# Altium PCB Car Power Supply 2x Line v1.0 (60x55x26 Case B035 BX35B-2).PcbDoc
Units mm, origin at the board's own origin, x right, y up, seen from the top; angles counter-clockwise.
Board outline 53.01 x 48 mm, 2 copper layers (Top Layer, Bottom Layer); 37 components, 19 nets, 68 pads, 4 vias.
Unrouted connection lines stored in the file: 4.
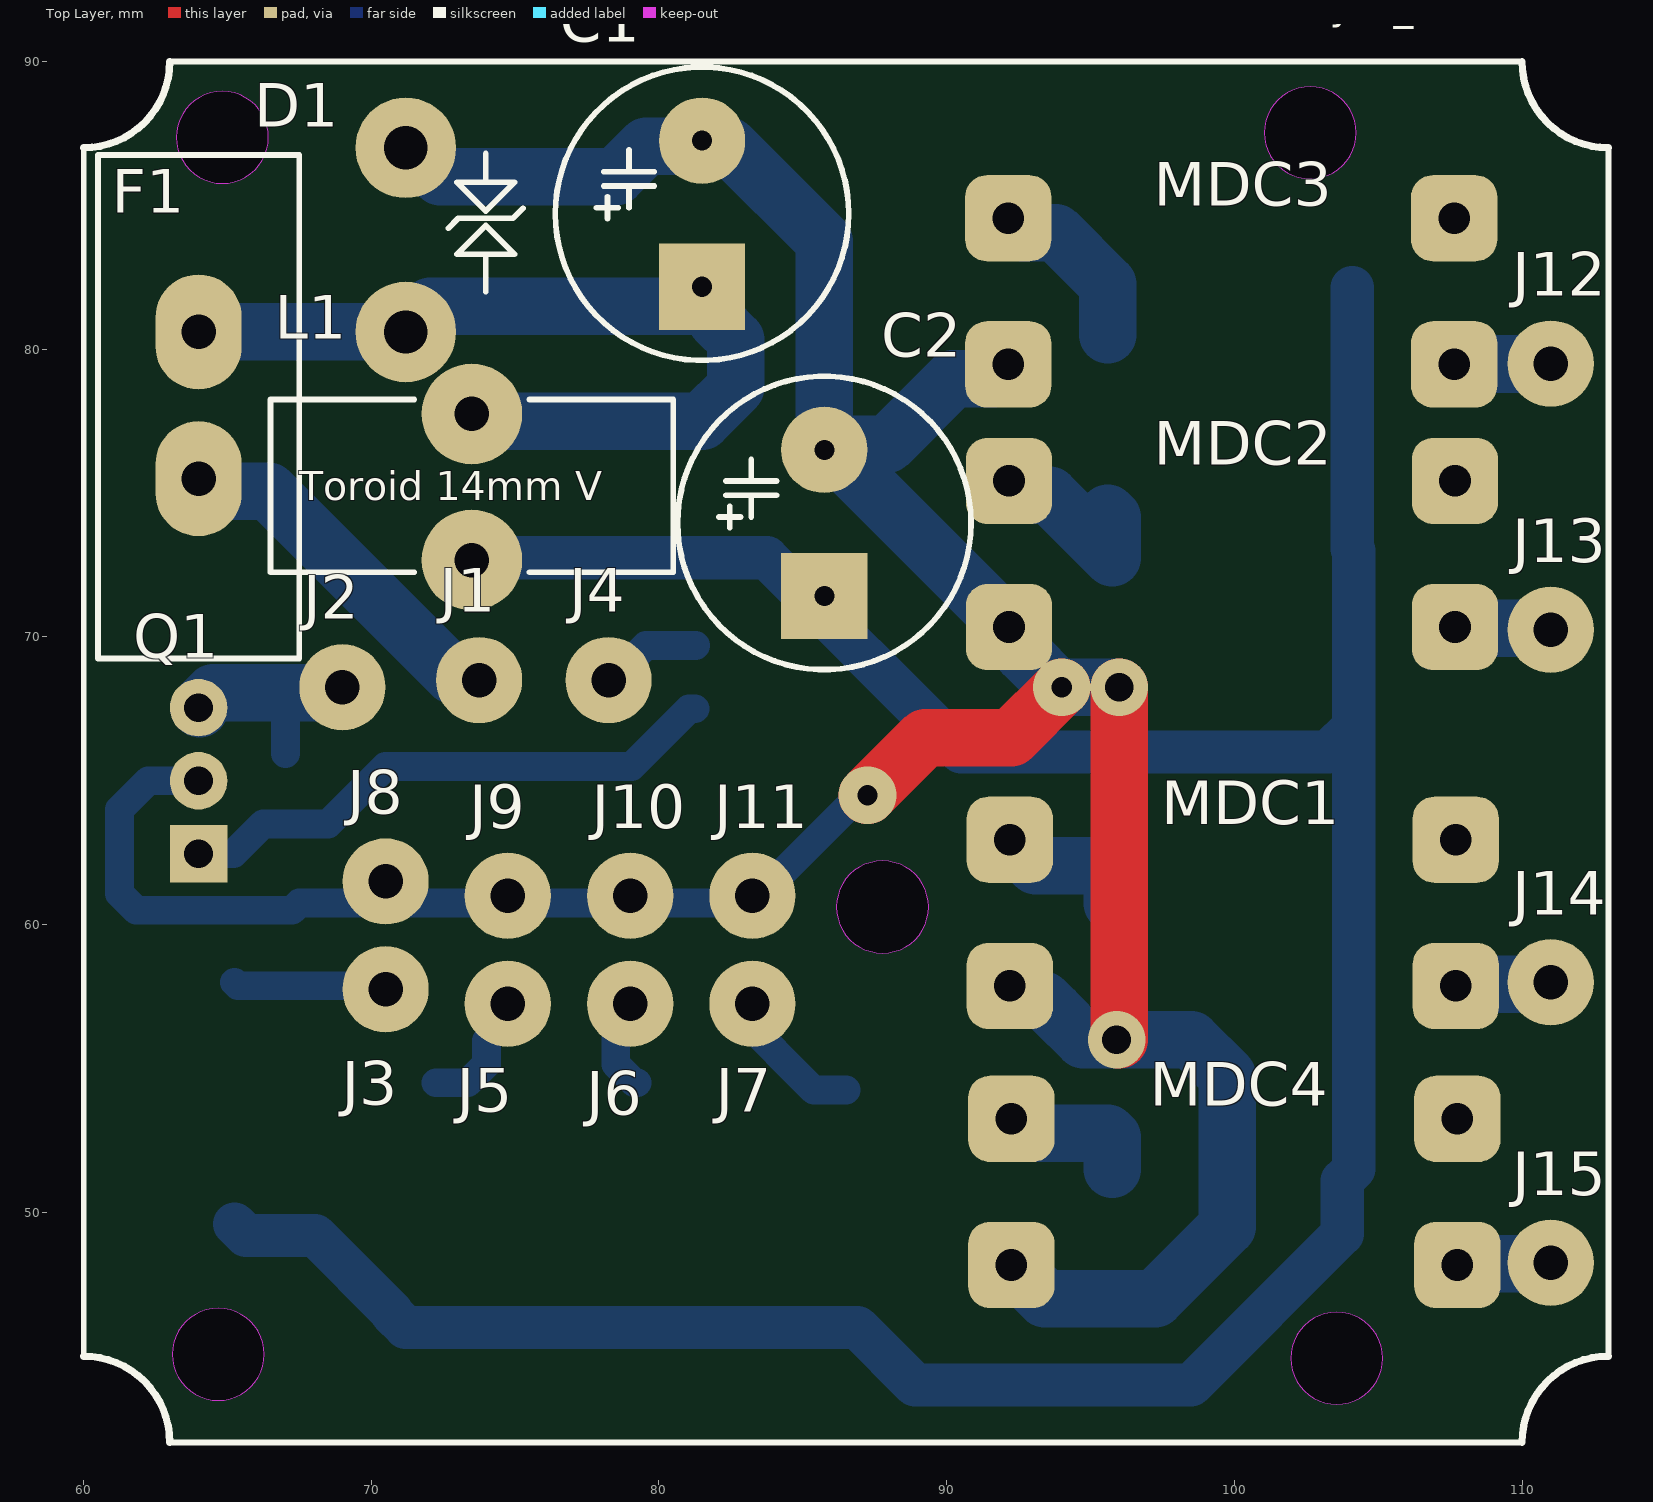
[diagram p0: Top Layer view]
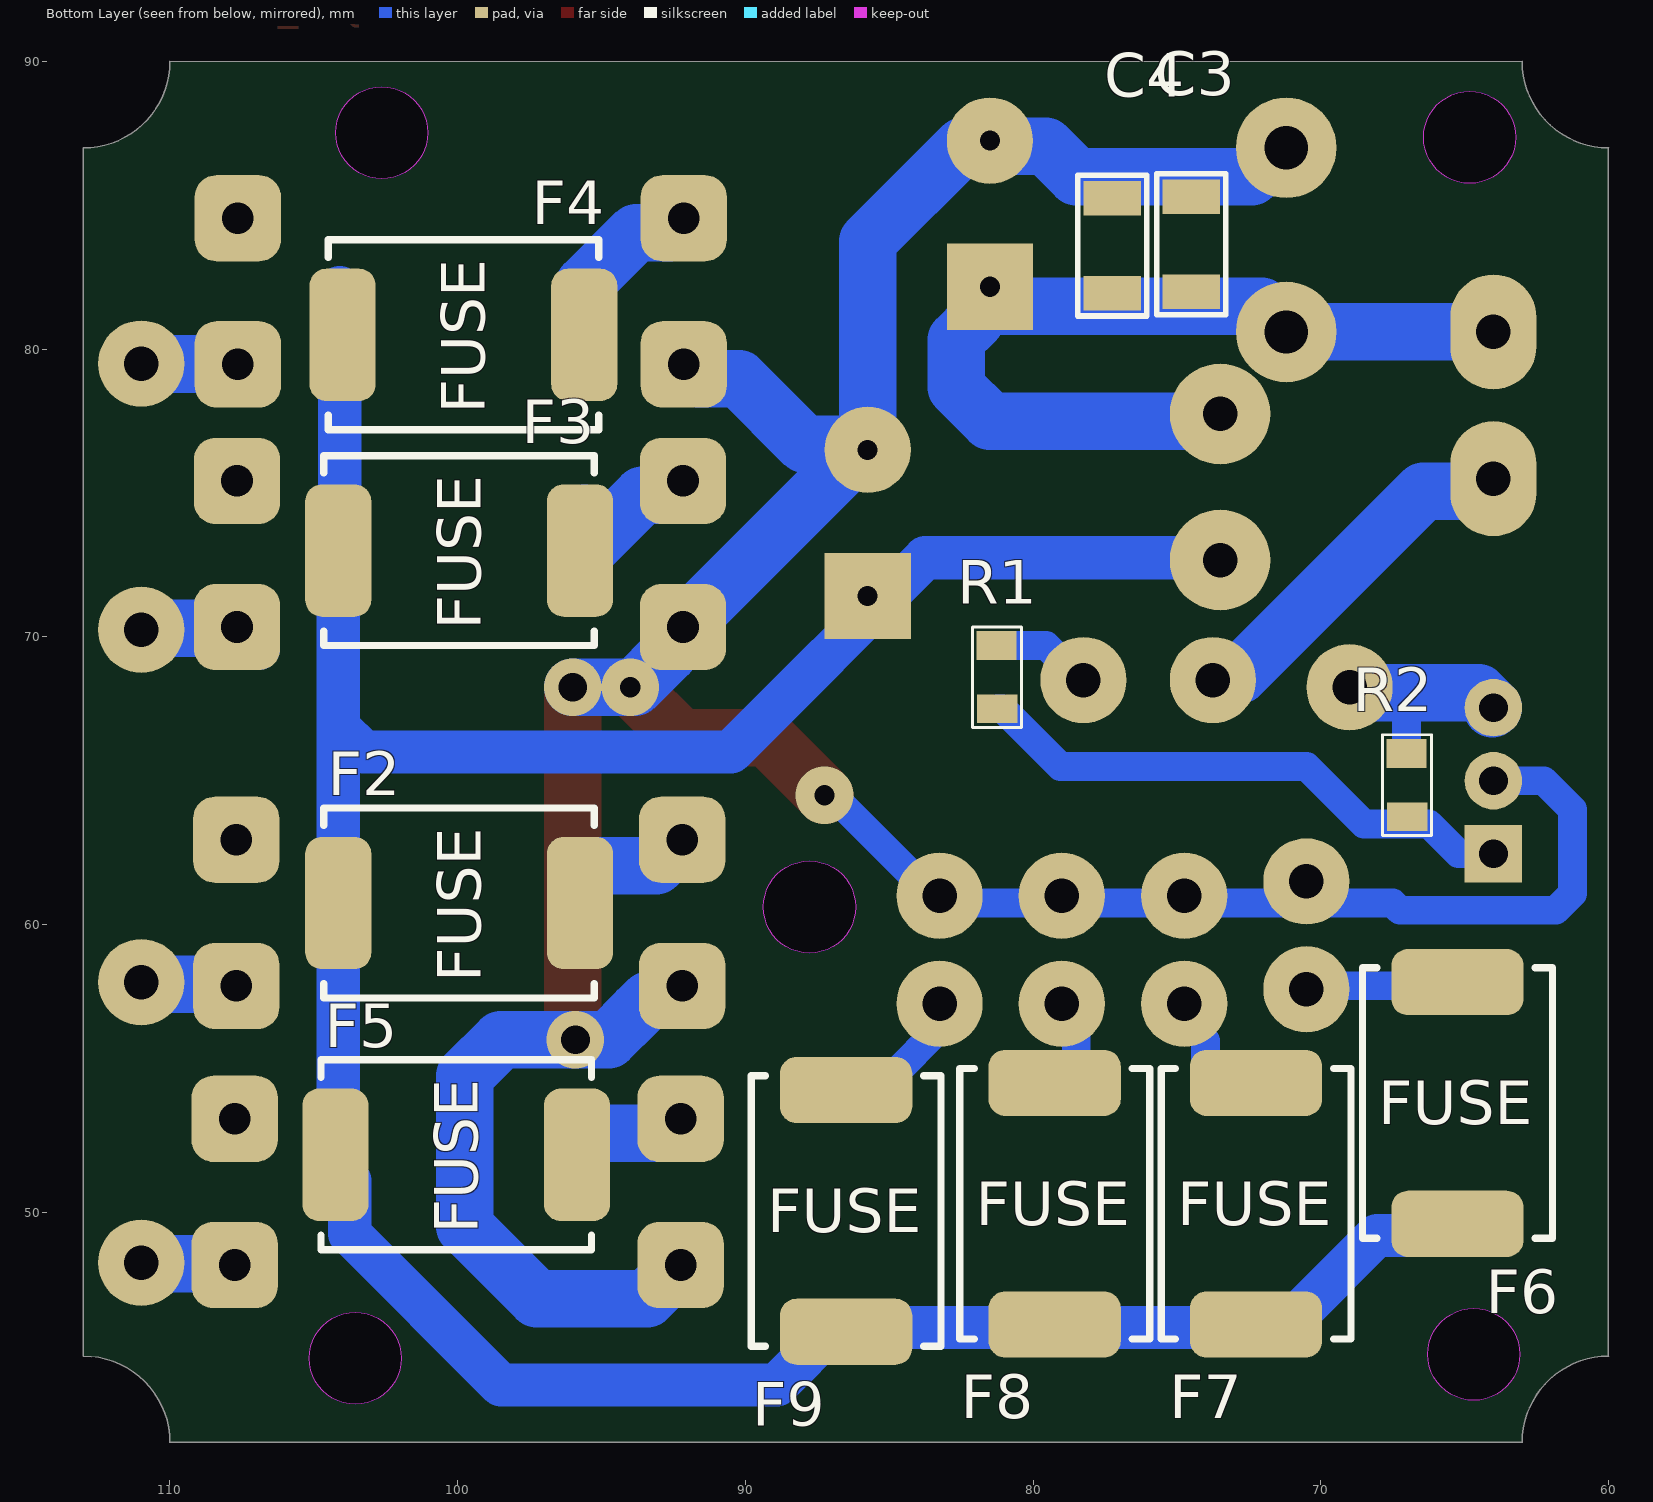
[diagram p1: Bottom Layer view, seen from below]

## Layer stack, top to bottom
Top Solder: solder mask 0.0102, Solder Resist, Dk 3.5
Top Layer: signal copper 0.0356
Dielectric 1: dielectric 0.32, FR-4, Dk 4.8
Bottom Layer: signal copper 0.0356
Bottom Solder: solder mask 0.0102, Solder Resist, Dk 3.5

## Board outline
60.006,45 60.006,87 60,87 ccw(c60,90) 63,90 63,89.998 110,90 ccw(c113,90) 113,87 113.006,87 113.006,45 113,45 ccw(c113,42) 110,42 63,42 ccw(c60,42)
cut-out: 86.172,60.612 ccw(c87.772,60.612) 87.772,59.012 ccw(c87.772,60.612) 89.372,60.612 ccw(c87.772,60.612) 87.772,62.212 ccw(c87.772,60.612)
cut-out: 63.081,45.062 ccw(c64.681,45.062) 64.681,43.462 ccw(c64.681,45.062) 66.281,45.062 ccw(c64.681,45.062) 64.681,46.662 ccw(c64.681,45.062)
cut-out: 63.23,87.361 ccw(c64.83,87.361) 64.83,85.761 ccw(c64.83,87.361) 66.43,87.361 ccw(c64.83,87.361) 64.83,88.961 ccw(c64.83,87.361)
cut-out: 101.962,44.931 ccw(c103.562,44.931) 103.562,43.331 ccw(c103.562,44.931) 105.162,44.931 ccw(c103.562,44.931) 103.562,46.531 ccw(c103.562,44.931)
cut-out: 101.038,87.522 ccw(c102.638,87.522) 102.638,85.922 ccw(c102.638,87.522) 104.238,87.522 ccw(c102.638,87.522) 102.638,89.122 ccw(c102.638,87.522)

## Design rules (kind name [scope] priority, off if disabled: settings)
Clearance [All] p1: gap=0.3 ignorepadtopadclearanceinfootprint=FALSE except(0: Arc-Hole Track-Hole SMDPad-Hole THPad-Hole Via-Hole Fill-Hole Poly-Hole Region-Hole Text-Hole)
ComponentClearance [All] p1: gap=0.01 collisioncheckmode=3 verticalgap=0.2 showdistances=FALSE
Height [All] p1: minheight=0 maxheight=25 prefheight=12.7
HoleSize [All] p1: absolutevalues=TRUE maxlimit=3.2 minlimit=0.4 maxpercent=80.000 minpercent=20.000
HoleToHoleClearance [All] p1: gap=0.2 allowstackedmicrovias=TRUE
PlaneClearance [All] p1: clearance=0.5
PlaneConnect [All] p1: planeconnectstyle=Relief reliefexpansion=0.508 reliefentries=4 reliefconductorwidth=0.5 reliefairgap=0.5
PolygonConnect [All] p1: connectstyle=Relief reliefconductorwidth=0.5 reliefentries=4 polygonreliefangle="90 Angle" airgapwidth=0.5
RoutingVias [All] p1: holewidth=0.7 width=1.5 viastyle="Through Hole" minholewidth=0.4 minwidth=0.4 maxholewidth=3.2 maxwidth=7
SilkToSilkClearance [All] p1: silktosilkclearance=0.05
SilkToSolderMaskClearance [IsPad] p1: minsilkscreentomaskgap=0.2 clearancetoexposedcopper=TRUE
SolderMaskExpansion [All] p1: expansion=0.1 istentingtop=FALSE
Width [All] p1: maxlimit=3 minlimit=0.2 preferedwidth=0.5
22 further rules are at their usual default settings.

## Components (designator, comment, footprint, x,y, rotation, side; value= is the part's Value field where it differs from the comment)
C1 "25V 1000uF" "Cap E p5.08mm D10.2mm (3p)" 81.5,82.17 r90 top
C2 "25V 1000uF" "Cap E p5.08mm D10.2mm (3p)" 85.75,71.42 r90 top
C3 "10nF" "SMD 1206 (3216)" 74.5,82 r90 bottom
C4 "100nF" "SMD 1206 (3216)" 77.25,81.95 r90 bottom
D1 "1.5KE20CA" "TVS diode DO-201 V" 71.203,87 r270 top
F1 "A" "Fuse RGE1100" 64,75.5 r180 top
F2 "2.5A" "Fuse SM250" 104.15,60.75 r180 bottom
F3 "2.5A" "Fuse SM250" 104.15,73 r180 bottom
F4 "2.5A" "Fuse SM250" 104,80.5 r180 bottom
F5 "2.5A" "Fuse SM250" 104.25,52 r180 bottom
F6 "2.5A" "Fuse SM250" 65.25,58 r270 bottom
F7 "2.5A" "Fuse SM250" 72.25,54.5 r270 bottom
F8 "2.5A" "Fuse SM250" 79.25,54.5 r270 bottom
F9 "2.5A" "Fuse SM250" 86.5,54.25 r270 bottom
J1 "OnePinC" "OnePin 1.2x3" 73.75,68.5 r0 top
J2 "OnePinC" "OnePin 1.2x3" 69,68.25 r0 top
J3 "+12V #1" "OnePin 1.2x3" 70.5,57.75 r0 top
J4 "OnePinC" "OnePin 1.2x3" 78.25,68.5 r0 top
J5 "+12V #2" "OnePin 1.2x3" 74.75,57.25 r0 top
J6 "+12V #3" "OnePin 1.2x3" 79,57.25 r0 top
J7 "+12V #4" "OnePin 1.2x3" 83.25,57.25 r0 top
J8 "OnePinC" "OnePin 1.2x3" 70.5,61.5 r0 top
J9 "OnePinC" "OnePin 1.2x3" 74.75,61 r0 top
J10 "OnePinC" "OnePin 1.2x3" 79,61 r0 top
J11 "OnePinC" "OnePin 1.2x3" 83.25,61 r0 top
J12 "OnePinC" "OnePin 1.2x3" 111,79.5 r0 top
J13 "OnePinC" "OnePin 1.2x3" 111,70.25 r0 top
J14 "OnePinC" "OnePin 1.2x3" 111,58 r0 top
J15 "OnePinC" "OnePin 1.2x3" 111,48.25 r0 top
L1 "Inductor V" "Toroid V D14-W6" 73.5,77.75 r270 top value=700uH
MDC1 "DC-DC" "DC-DC_MP1584N (SMALL R)" 92.196,62.949 r0 top
MDC2 "DC-DC" "DC-DC_MP1584N (SMALL R)" 92.169,75.422 r0 top
MDC3 "DC-DC" "DC-DC_MP1584N (SMALL R)" 92.142,84.552 r0 top
MDC4 "DC-DC" "DC-DC_MP1584N (SMALL R)" 92.25,53.25 r0 top
Q1 "IRF3205 PBf" TO220-2 64,62.46 r0 top
R1 "100 Om" "SMD 0805 (2012)" 81.275,69.625 r270 bottom
R2 "10k Om" "SMD 0805 (2012)" 67.025,65.875 r270 bottom

## Footprints (in the part's own frame and the unit in brackets; to place one, negate y for a bottom-side part, rotate by r counter-clockwise, add the part's x,y. Pads: shape width x height; smd on the part's side, far side on the other; paste and mask are expansions set on the pad)
"Cap E p5.08mm D10.2mm (3p)" [mm] "D 10.2mm; H 17.5mm, Hole: 0.7mm"
  rect 3x3 hole 0.7: 1(0,0)
  round 3 hole 0.7: 2(5.08,0)
  silkscreen extent -2.56,-5.1 7.64,5.1, body extent -2.49,-4.97 7.57,5.08, height 16.53
"DC-DC_MP1584N (SMALL R)" [mm]
  rrect50% 3x3 hole 1.1: GND(0,-5.08) GND(15.5,-5.08) IN(0,0) Out(15.5,0)
  body extent -1.27,-6.35 16.84,1.25, height 11.8
"Fuse RGE1100" [mm] "Resettable 11A"
  oval 3x4 hole 1.2: 1(0,0) 2(0,-5.1)
  silkscreen extent -3.5,-11.25 3.5,6.25, body extent -1.53,-6.19 1.43,1.39, height 15
"Fuse SM250" [mm] "Resettable 11A"
  rrect50% 2.3x4.6 smd: 1(0,0) 2(8.4,0)
  silkscreen extent -0.5,-3.3 8.9,3.3, body extent -0.5,-3.35 8.9,3.36, height 3
"OnePin 1.2x3" [mm]
  round 3 hole 1.2: 1(0,0)
"SMD 0805 (2012)" [mm]
  rect 1x1.4 smd: 1(-0.075,0) 2(2.125,0.025)
  silkscreen extent -0.72,-0.82 2.78,0.87, body extent 0.03,-0.6 2.03,0.65, height 0.45
"SMD 1206 (3216)" [mm]
  rect 1.2x2 smd: 1(0,0) 2(3.3,0)
  silkscreen extent -0.8,-1.2 4.1,1.2, body extent 0.05,-0.75 3.25,0.85, height 1
TO220-2 [mm]
  rect 2x2 hole 1: 1(0,0)
  round 2 hole 1: 2(0,2.54) 3(0,5.08)
  body extent -2.7,-2.65 1.8,7.75, height 19
"Toroid V D14-W6" [mm] "10mm Black ring TEC.ORG"
  round 3.5 hole 1.2: 1(0,0) 2(5.08,0)
  silkscreen extent -0.5,-7 5.5,7
"TVS diode DO-201 V" [mm] "6p, p15.24mm"
  round 3.5 hole 1.5: 1(0,0) 2(6.4,0)
  silkscreen extent 0.2,1.47 5,4.07, body extent -2.8,-2.8 7.09,2.8, height 15.69

## Part data
C1 C2: library part "Cap E 1000mF x 25V", "Capacitor"
C3 C4: library part "Cap Ceramic SMD (All)", "Capacitor"
D1: library part "TVS 1.5KE20CA", "1500W Transil (TVS Diode)", Pulse Power=1500W, Breakdown V="min 19 max 21", Load A=5, PackageReference=DO-201, Stand-Off V=17.1
F1 F2 F3 F4 F5 F6 F7 F8 F9: library part Fuse, "Round fuse"
J1 J2 J3 J4 J5 J6 J7 J8 J9 J10 J11 J12 J13 J14 J15: library part "OnePin Connector", "Only pad"
L1: "Inductor Vertical", Code_IEC=1005, Code_JEITA=0402, LatestRevisionDate=29-May-2009, LatestRevisionNote="IPC-7351 Footprint Added.", PackageDescription="Chip Inductor", PackageReference=0402-A, Published=8-Jun-2000, Publisher="Altium Limited"
MDC1 MDC2 MDC3 MDC4: library part "DC-DC MP1584N", "DC-DC StepDown"
Q1: library part IRF3205, "N-Channel 55V - 0.008Ω - 110A", I d - Drain current (continuous) at TC = 25°C="110 A", I d - Drain current (continuous) at TC = 100°C="80 A", C ISS Входная емкость="3247 pF", C OSS Выходная емкость="781 pF", DataSheet=http://tec.org.ru/_bd/2/223_IRF3205.pdf, Monufacturer=IOR, Name="IRF3205 PBf", RDS Сопротивление Сток-Исток="0.008 Om", URL=http://tec.org.ru/board/49-1-0-223, V DSS (v)=55V, VGS Макс напр на гейте="+-20 V", VGS Порог Открытия="+2....+4 V"
R1 R2: library part "Res All Types"

## Via types
v1: diameter 2, hole 0.711, Top Layer to Bottom Layer, 2 vias
v2: diameter 2, hole 1, Top Layer to Bottom Layer, 2 vias

## Nets (pads, with @x,y where several pads share a name; then routed paths per layer and width w, separated by ;. In a path a pad name is that pad's centre, name@x,y a point inside that pad or via, vN(x,y) a via of type N, cw(c..) or ccw(c..) an arc to the next point about the centre after c; other vN are vias at no path point)
"+5V #1": MDC1.Out
"+5V #2": MDC2.Out
"+5V #3": MDC3.Out
"+5V #4": MDC4.Out
"+12 V RAW": C1.1 C3.1 C4.1 D1.2 F1.2 L1.1 | length 30
  Bottom Layer w2: F1.2 71.156,80.6 72.056,81.5 74.5,81.5 77.25,81.5 C1.1@81,81.5 ; L1.1@74.5,77.5 81.5,77.5 82.672,78.672 82.672,80.328 82,81 82,81.67 C1.1
+12V: F1.1 J1.1 | length 12.6
  Bottom Layer w2: F1.1 64.432,75.068 66.432,75.068 72.809,68.691 73.559,68.691 J1.1
"+12V No Noise": C2.1 F2.1 F3.1 F4.1 F5.1 F6.2 F7.2 F8.2 F9.2 L1.2 | length 109
  Bottom Layer w1.5: F6.2 65.65,49.2 68.05,49.2 70.7,46.55 70.7,46.5 71.2,46 78.5,46 85.75,46 86.9,46 88.9,44 98.5,44 103.75,49.25 103.75,51.1 104.15,51.5 F2.1 104.15,66.879 ; L1.2@74.5,72.67 74.58,72.75 83.75,72.75 90.5,66 103.271,66 104.15,66.879 ; F4.1@104.1,82.15 104.1,73.05 F3.1 104.15,66.879
GND: C1.2 C2.2 C3.2 C4.2 D1.1 J8.1 J9.1 J10.1 J11.1 J12.1 J13.1 J14.1 J15.1 MDC1.GND MDC2.GND MDC3.GND MDC4.GND Q1.2 | length 136.9
  Top Layer w2: v1(87.25,64.5) 89.25,66.5 92.25,66.5 v1(94,68.25) ; v2@96,56 v2(96,68.25)
  Bottom Layer w1: Q1.2 62.25,65 61.25,64 61.25,61.086 61.836,60.5 67.25,60.5 67.5,60.75 70.75,60.75 74.5,60.75 78.5,60.75 82.75,60.75 83.229,60.75 86.979,64.5 v1(87.25,64.5)
  Bottom Layer w1.5: MDC2.GND@106.919,69.592 MDC2.GND@107.669,70.342
  Bottom Layer w2: D1.1@71.406,87 72.406,86 78.5,86 79.559,87.059 82.441,87.059 85.75,83.75 C2.2 C2.2@85.881,76.63 ; MDC3.GND@92.142,79.472 91.642,78.972 90.222,78.972 87.941,76.691 85.941,76.691 C2.2@85.881,76.63 ; MDC1.GND@92.196,57.869 92.696,57.369 93.381,57.369 93.751,56.999 94.75,56 v2(95.908,56) 98.5,56 99.75,54.75 99.75,49.5 97.25,47 93.42,47 MDC4.GND@92.25,48.17 ; MDC2.GND@92.669,69.422 93.841,68.25 v1(94,68.25) v2(96,68.25) ; MDC2.GND@92.669,69.842 92.169,70.342 C2.2@85.881,76.63 ; MDC3.GND@107.642,79.472 107.656,79.486 110.986,79.486 J12.1 ; MDC2.GND@107.669,70.342 107.715,70.296 110.954,70.296 J13.1 ; MDC1.GND@107.696,57.869 107.761,57.935 110.935,57.935 J14.1 ; MDC4.GND@107.75,48.17 107.79,48.21 110.96,48.21 J15.1
"GND In": J2.1 Q1.3 R2.1 | length 7.5
  Bottom Layer w1: 67,68.059 67.025,68.034 R2.1
  Bottom Layer w2: Q1.3@64.04,67.5 Q1.3 64.519,68.059 67,68.059 68.809,68.059 J2.1
NetF2_2: F2.2 MDC1.IN | length 5.1
  Bottom Layer w2: MDC1.IN 93.095,62.05 95.6,62.05 95.75,61.9 F2.2
NetF3_2: F3.2 MDC2.IN | length 6
  Bottom Layer w2: MDC2.IN 92.669,74.922 93.578,74.922 F3.2@95.75,72.75 ; F3.2@95.6,74.3 95.75,74.15 F3.2
NetF4_2: F4.2 MDC3.IN | length 6.2
  Bottom Layer w2: MDC3.IN 92.642,84.052 93.798,84.052 95.6,82.25 F4.2
NetF5_2: F5.2 MDC4.IN | length 4.9
  Bottom Layer w2: MDC4.IN 92.75,52.75 95.6,52.75 95.75,52.6 F5.2@95.75,51.5
NetF6_1: F6.1 J3.1 | length 5.1
  Bottom Layer w1: F6.1 65.375,57.875 70.125,57.875 J3.1@70.25,57.75
NetF7_1: F7.1 J5.1 | length 4.3
  Bottom Layer w1: F7.1 73.359,54.5 74.004,55.144 74.004,55.963 74.367,56.326 74.367,57.133 J5.1@74.25,57.25
NetF8_1: F8.1 J6.1 | length 3.1
  Bottom Layer w1: J6.1@78.5,57.25 78.5,55.144 79.144,54.5 F8.1
NetF9_1: F9.1 J7.1 | length 5.2
  Bottom Layer w1: J7.1@82.75,57.25 82.75,56.891 85.391,54.25 F9.1
NetQ1_1: Q1.1 R1.2 R2.2 | length 19.3
  Bottom Layer w1: Q1.1 65.21,62.46 66.25,63.5 68.5,63.5 70.5,65.5 79.05,65.5 81.05,67.5 R1.2
"ON Ingition": J4.1 R1.1 | length 3.5
  Bottom Layer w1: J4.1 78.35,68.5 79.55,69.7 R1.1

## Other copper
Top Layer:
  text ".Layer_Name" at 101.284,91.467 h1
Bottom Layer:
  text ".Layer_Name" at 75,92 h1

## Silkscreen, mask and mechanical layers (free items; w line width, h text height)
Top Overlay:
  lines w0.2: 60.006,45 60.006,87 ; 60.006,49.498 60.006,60.498 ; 63,42 110,42 ; 63,89.998 110,90 ; 113.006,45 113.006,87
  lines w0.254: 60,45 cw(c60,42) 63,42 ; 60,87 ccw(c60,90) 63,90 ; 110,42 cw(c113,42) 113,45 ; 110,90 ccw(c113,90) 113,87
  text ".Layer_Name" at 101.284,91.467 h1
Bottom Overlay:
  text ".Layer_Name" at 75,92 h1
Top Solder:
  text ".Layer_Name" at 101.284,91.467 h1
Bottom Solder:
  text ".Layer_Name" at 75,92 h1
Mechanical 2:
  text "60x55x26 mm" at 61,95.25 h1
  text ":case B035 / BX35B-2 Alu" at 60.975,93.475 h1
  text ".Pcb_File_Name_No_Path" at 60.925,91.425 h1
Mechanical 3:
  text "60x55x26 mm" at 113,95 h1
  text ":case B035 / BX35B-2 Alu" at 113,92.942 h1
  text ".Pcb_File_Name_No_Path" at 112.619,91.446 h1

## Dimensions
60,43 to 113,43 on Mechanical 3
60,90 to 59,42 on Mechanical 3
60,90 to 59,42 on Mechanical 2
60,43 to 113,43 on Mechanical 2

## Text inside footprints (layer, text, board x,y; h text height)
F2: Bottom Overlay "FUSE" at 99.204,58.004 h1.52 r270
F3: Bottom Overlay "FUSE" at 99.204,70.254 h1.52 r270
F4: Bottom Overlay "FUSE" at 99.054,77.754 h1.52 r270
F5: Bottom Overlay "FUSE" at 99.304,49.254 h1.52 r270
F6: Bottom Overlay "FUSE" at 67.996,53.054 h1.52
F7: Bottom Overlay "FUSE" at 74.996,49.554 h1.52
F8: Bottom Overlay "FUSE" at 81.996,49.554 h1.52
F9: Bottom Overlay "FUSE" at 89.246,49.304 h1.52
L1: Top Overlay "Toroid 14mm V" at 67.5,74.75 h1